# Altium PCB outputs.PcbDoc
Units mil, origin at the board's own origin, x right, y up, seen from the top; angles counter-clockwise.
Board outline 4200 x 640 mil, 2 copper layers (Top Layer, Bottom Layer); 5 components, 24 nets, 39 pads, 0 vias.
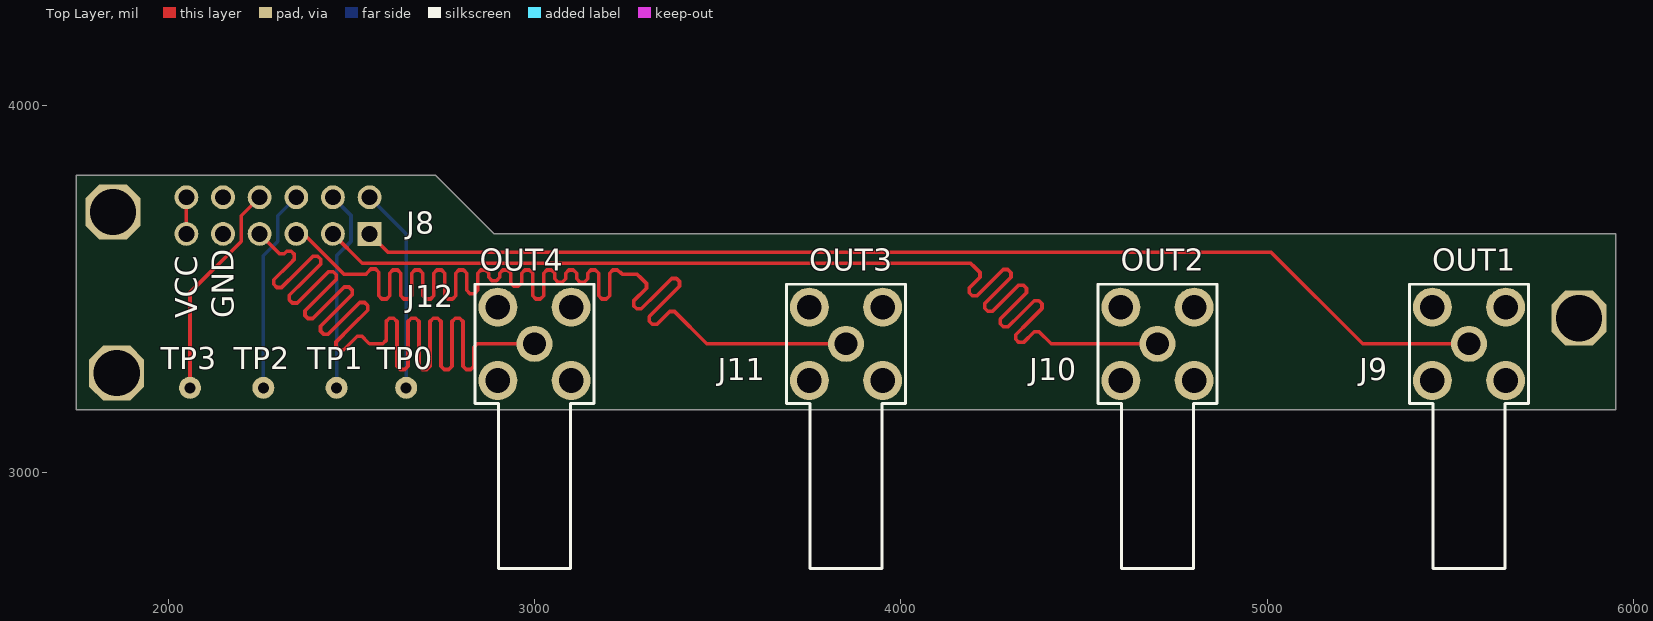
[diagram p0: Top Layer view]
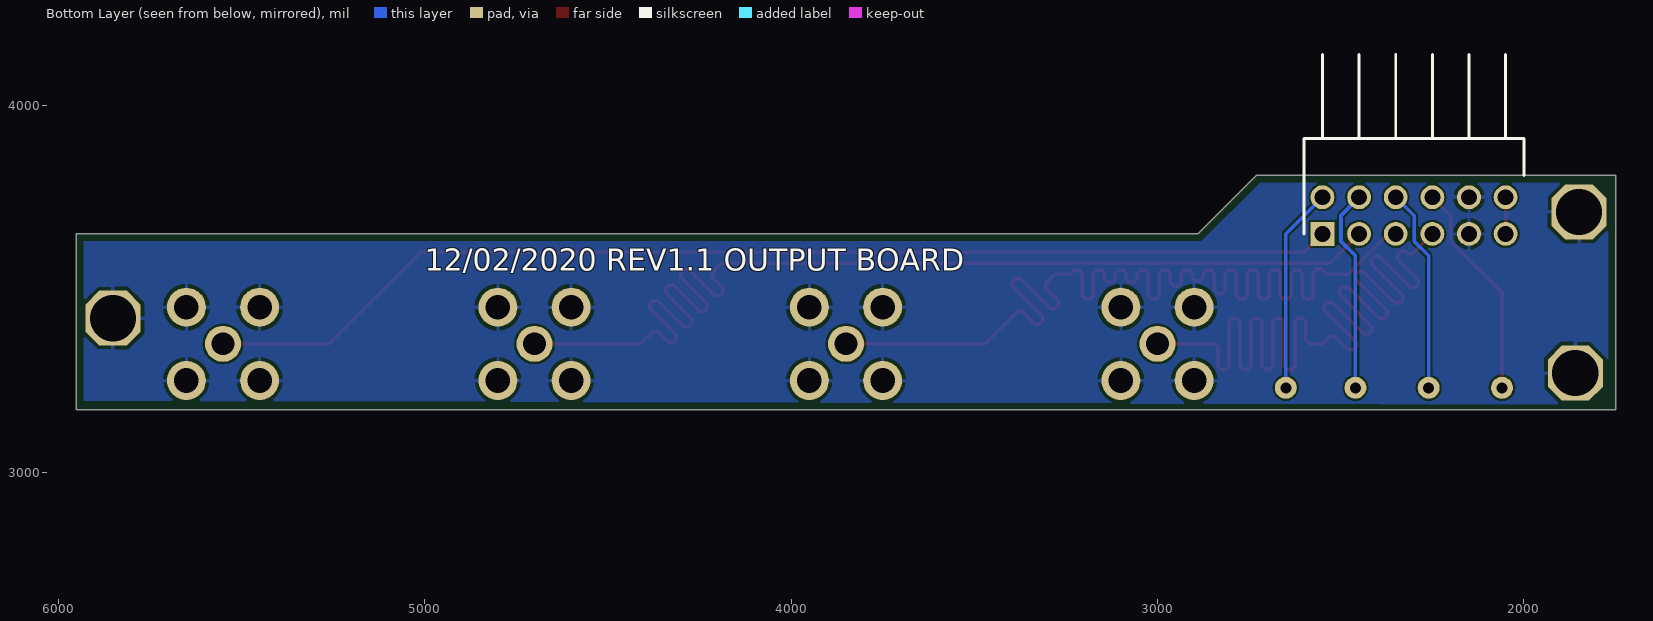
[diagram p1: Bottom Layer view, seen from below]

## Layer stack, top to bottom
Top Solder: solder mask 0.4, Solder Resist, Dk 3.5
Top Layer: signal copper 1.4
Dielectric 1: dielectric 12.6, FR-4, Dk 4.8
Bottom Layer: signal copper 1.4
Bottom Solder: solder mask 0.4, Solder Resist, Dk 3.5

## Board outline
1750,3170 1750,3810 2730,3810 2890,3650 5950,3650 5950,3170

## Design rules (kind name [scope] priority, off if disabled: settings)
BoardOutlineClearance [All] p1: gap=16 ignorepadtopadclearanceinfootprint=FALSE except(0: Arc-SplitContinuation Track-SplitContinuation SMDPad-SplitContinuation THPad-SplitContinuation Via-SplitContinuation Fill-SplitContinuation Poly-SplitContinuation Region-SplitContinuation Text-SplitContinuation)
Clearance [All] p1: gap=6 ignorepadtopadclearanceinfootprint=FALSE except(0: Arc-Hole Track-Hole SMDPad-Hole THPad-Hole Via-Hole Fill-Hole Poly-Hole Region-Hole Text-Hole; 12: Arc-SMDPad Arc-THPad Track-SMDPad Track-THPad SMDPad-SMDPad SMDPad-THPad THPad-THPad)
HoleSize [All] p1: absolutevalues=TRUE maxlimit=245 minlimit=12 maxpercent=80.000 minpercent=20.000
MatchedLengths PMOD->SMA [All] p1: tolerance=50 checknetsindiffpair=FALSE checkdiffpairvsdiffpair=TRUE checkxsignals=TRUE checkothers=TRUE
PolygonConnect [All] p1: connectstyle=Relief reliefconductorwidth=10 reliefentries=4 polygonreliefangle="90 Angle" airgapwidth=10
RoutingVias [All] p1: holewidth=245 width=490 viastyle="Through Hole" minholewidth=6 minwidth=12 maxholewidth=23.62 maxwidth=47.24
SolderMaskExpansion [All] p1: expansion=4
Width [All] p1: maxlimit=78.74 minlimit=6 preferedwidth=10 minimp=50.000000 maximp=50.000000 favimp=50.000000
29 further rules are at their usual default settings.

## Components (designator, comment, footprint, x,y, rotation, side; value= is the part's Value field where it differs from the comment)
J8 "OUTPUTS" HDRRA12W64P254_2X6_1524X254X610P 2550,3650 r180 top
J9 "OP0" 142-0701-501 5550,3512.6 r90 top
J10 "OP1" 142-0701-501 4700,3512.6 r90 top
J11 "OP2" 142-0701-501 3850,3512.6 r90 top
J12 "OP3" 142-0701-501 3000,3512.6 r90 top

## Footprints (in the part's own frame and the unit in brackets; to place one, negate y for a bottom-side part, rotate by r counter-clockwise, add the part's x,y. Pads: shape width x height; smd on the part's side, far side on the other; paste and mask are expansions set on the pad)
142-0701-501 [mm]
  round 2.5 hole 1.57: 1(-4.13,0)
  round 2.7 hole 1.7: 2(-6.67,2.54) 3(-1.59,2.54) 4(-6.67,-2.54) 5(-1.59,-2.54)
  silkscreen extent -19.69,-4.13 0,4.13
HDRRA12W64P254_2X6_1524X254X610P [mm]
  rect 1.65x1.65 hole 1.1: 1(0,0)
  round 1.65 hole 1.1: 2(0,-2.54) 3(2.54,0) 4(2.54,-2.54) 5(5.08,0) 6(5.08,-2.54) 7(7.62,0) 8(7.62,-2.54) 9(10.16,0) 10(10.16,-2.54) 11(12.7,0) 12(12.7,-2.54)
  body extent -1.27,-12.44 13.97,0.32, height 6.1

## Part data
J8: library part TSW-106-08-L-D-RA, "Connector", Manufacturer_Name=SAMTEC, Mouser Part Number=200-TSW10608LDRA, RS Part Number=7670934P, Datasheet Link=http://suddendocs.samtec.com/catalog_english/tsw_th.pdf, Height=6.1mm, Manufacturer_Part_Number=TSW-106-08-L-D-RA, Mouser Price/Stock=https://www.mouser.com/Search/Refine.aspx?Keyword=200-TSW10608LDRA, RS Price/Stock=http://uk.rs-online.com/web/p/products/7670934P
J9 J10 J11 J12: library part 142-0701-501, "Connector", Manufacturer_Name=Cinch, RS Part Number=8859850, Datasheet Link=http://uk.rs-online.com/web/p/products/8859850, Manufacturer_Part_Number=142-0701-501, RS Price/Stock=http://uk.rs-online.com/web/p/products/8859850

## Free pads (board coordinates)
  round 60 hole 30: 5(2650,3230) 6(2460,3230) 7(2260,3230) 8(2060,3230)
  oct 150x150 hole 126: 9(1850,3710) 9(1860,3270) 9(5850,3420)

## Nets (pads, with @x,y where several pads share a name; then routed paths per layer and width w, separated by ;. In a path a pad name is that pad's centre, name@x,y a point inside that pad or via, vN(x,y) a via of type N, cw(c..) or ccw(c..) an arc to the next point about the centre after c; other vN are vias at no path point)
GND: J8.9 J8.10 J9.2 J9.3 J9.4 J9.5 J10.2 J10.3 J10.4 J10.5 J11.2 J11.3 J11.4 J11.5 J12.2 J12.3 J12.4 J12.5 pad.9
IL0: 
IL1: 
IL2: 
IL3: 
IL4: 
IL5: 
NetIC2_13: 
NetIC2_14: 
NetIC2_15: 
NetIC2_16: 
NetIC2_17: 
NetIC2_18: 
OP0: J8.1 J9.1 | length 3124.3
  Top Layer w10: J8.1 2600,3600 5010,3600 5260,3350 J9.1
OP1: J8.3 J10.1 | length 3124.3
  Top Layer w10: J8.3 2530,3570 4190,3570 4200.61,3559.39 4215.46,3544.54 4215.46,3531.82 4186.04,3502.4 4186.04,3489.68 4194.53,3481.19 4207.26,3481.19 4243.03,3516.97 4278.81,3552.74 4291.54,3552.74 4300.02,3544.26 4300.02,3531.53 4264.25,3495.75 4228.47,3459.98 4228.47,3447.25 4236.95,3438.76 4249.68,3438.76 4285.46,3474.54 4321.24,3510.32 4333.96,3510.32 4342.45,3501.83 4342.45,3489.1 4306.67,3453.33 4270.9,3417.55 4270.9,3404.82 4279.38,3396.34 4292.11,3396.34 4327.89,3432.11 4363.66,3467.89 4376.39,3467.89 4384.88,3459.41 4384.88,3446.68 4349.1,3410.9 4313.32,3375.12 4313.32,3362.4 4321.81,3353.91 4334.53,3353.91 4363.95,3383.32 4376.68,3383.32 4410,3350 J10.1
OP2: J8.5 J11.1 | length 3130.5
  Top Layer w10: J8.5 2370,3650 2480,3540 2530,3540 2540,3540 2545,3545 2554,3554 2566,3554 2575,3545 2575,3540 2575,3481.44 2584,3472.44 2596,3472.44 2605,3481.44 2605,3540 2605,3542.57 2614,3551.57 2626,3551.57 2635,3542.57 2635,3540 2635,3481.44 2644,3472.44 2656,3472.44 2665,3481.44 2665,3540 2665,3542.57 2674,3551.57 2686,3551.57 2695,3542.57 2695,3540 2695,3481.44 2704,3472.44 2716,3472.44 2725,3481.44 2725,3540 2725,3542.57 2734,3551.57 2746,3551.57 2755,3542.57 2755,3540 2755,3481.44 2764,3472.44 2776,3472.44 2785,3481.44 2785,3540 2785,3542.57 2794,3551.57 2806,3551.57 2815,3542.57 2815,3540 2815,3495.98 2824,3486.98 2836,3486.98 2845,3495.98 2845,3540 2845,3542.57 2854,3551.57 2866,3551.57 2875,3542.57 2875,3540 2875,3531.47 2884,3522.47 2896,3522.47 2905,3531.47 2905,3540 2905,3542.57 2914,3551.57 2926,3551.57 2935,3542.57 2935,3540 2935,3516.07 2944,3507.07 2956,3507.07 2965,3516.07 2965,3540 2965,3542.57 2974,3551.57 2986,3551.57 2995,3542.57 2995,3540 2995,3481.44 3004,3472.44 3016,3472.44 3025,3481.44 3025,3540 3025,3542.57 3034,3551.57 3046,3551.57 3055,3542.57 3055,3540 3055,3527.35 3064,3518.35 3076,3518.35 3085,3527.35 3085,3540 3085,3542.57 3094,3551.57 3106,3551.57 3115,3542.57 3115,3540 3115,3527.35 3124,3518.35 3136,3518.35 3145,3527.35 3145,3540 3145,3542.57 3154,3551.57 3166,3551.57 3175,3542.57 3175,3540 3175,3481.44 3184,3472.44 3196,3472.44 3205,3481.44 3205,3540 3205,3542.57 3214,3551.57 3226,3551.57 3235,3542.57 ; 3235,3542.68 3235,3544.89 ; 3235,3545 3240,3540 3265,3540 3280,3540 3290.61,3529.39 3305.46,3514.54 3305.46,3501.82 3270.41,3466.77 3270.41,3454.04 3278.89,3445.56 3291.62,3445.56 3333.03,3486.97 3374.44,3528.38 3387.17,3528.38 3395.66,3519.89 3395.66,3507.17 3354.25,3465.75 3312.83,3424.34 3312.83,3411.61 3321.32,3403.13 3334.05,3403.13 3369.1,3438.18 3381.82,3438.18 3470,3350 J11.1
OP3: J8.7 J12.1 | length 3093.7
  Top Layer w10: J8.7 2300,3600 2304.24,3595.76 2316.97,3595.76 2323.65,3602.43 2336.38,3602.43 2344.86,3593.95 2344.86,3581.22 2331.82,3568.18 2288.69,3525.05 2288.69,3512.32 2297.17,3503.83 2309.9,3503.83 2353.03,3546.97 2395.36,3589.29 2408.08,3589.29 2416.57,3580.81 2416.57,3568.08 2374.25,3525.75 2331.11,3482.62 2331.11,3469.89 2339.6,3461.41 2352.33,3461.41 2395.46,3504.54 2437.78,3546.86 2450.51,3546.86 2459,3538.38 2459,3525.65 2416.67,3483.33 2373.54,3440.19 2373.54,3427.47 2382.02,3418.98 2394.75,3418.98 2437.89,3462.11 2481.02,3505.25 2493.75,3505.25 2502.23,3496.76 2502.23,3484.03 2459.1,3440.9 2415.97,3397.77 2415.97,3385.04 2424.45,3376.55 2437.18,3376.55 2480.31,3419.69 2523.45,3462.82 2536.17,3462.82 2544.66,3454.34 2544.66,3441.61 2501.53,3398.47 2458.39,3355.34 2458.39,3342.61 2466.88,3334.13 2479.61,3334.13 2516.37,3370.9 2529.1,3370.9 2543.95,3356.05 2550,3350 2565,3350 2586,3350 2595,3359 2595,3411 2604,3420 2616,3420 2625,3411 2625,3350 2625,3289 2634,3280 2646,3280 2655,3289 2655,3350 2655,3411 2664,3420 2676,3420 2685,3411 2685,3350 2685,3289 2694,3280 2706,3280 2715,3289 2715,3350 2715,3411 2724,3420 2736,3420 2745,3411 2745,3350 2745,3289 2754,3280 2766,3280 2775,3289 2775,3350 2775,3411 2784,3420 2796,3420 2805,3411 2805,3350 2805,3289 2814,3280 2826,3280 2835,3289 2835,3341 2844,3350 2990,3350 J12.1
OTP0: J8.2 pad.5 | length 561.4
  Bottom Layer w10: J8.2 2650,3650 pad.5
OTP1: J8.4 pad.6 | length 556.8
  Bottom Layer w10: J8.4 2499.48,3700.52 2499.48,3629.5 2460,3590.02 pad.6
OTP2: J8.6 pad.7 | length 557.3
  Bottom Layer w10: pad.7 2260,3590.02 2299.48,3629.5 2299.48,3699.48 J8.6
OTP3: J8.8 pad.8 | length 598.7
  Top Layer w10: pad.8 2060,3490.02 2199.48,3629.5 2199.48,3699.48 J8.8
TP0: 
TP1: 
VCC: J8.11 J8.12 | length 100
  Top Layer w10: J8.11 J8.12

## Polygon pours and split planes (outlines as drawn)
GND on Bottom Layer "GND_PLN" (solid, pour order 0): 1770,3790 1770,3183.65 5930,3194.7 5930,3630 2880,3630 2720,3790

## Silkscreen, mask and mechanical layers (free items; w line width, h text height)
Top Overlay:
  text "OUT4" at 2850,3550 h60
  text "OUT3" at 3750,3550 h60
  text "OUT2" at 4600,3550 h60
  text "OUT1" at 5450,3550 h60
  text "VCC" at 2080,3420 h60 r90
  text "GND" at 2180,3420 h60 r90
  text "TP3" at 1980,3280 h60
  text "TP2" at 2180,3280 h60
  text "TP1" at 2380,3280 h60
  text "TP0" at 2570,3280 h60
Bottom Overlay:
  text "12/02/2020 REV1.1 OUTPUT BOARD" at 5000,3550 h60
EdgeCuts:
  lines w10: 1750,3170 2800,3170 5950,3170 5950,3650 4942.5,3650 3667.5,3650 2890,3650 2730,3810 2710,3810 1750,3810 1750,3170

## Dimensions
3098.43,2737.4 to 3098.43,3187.4 on Dimensions
5950,3650 to 1750,3810 on Dimensions
5950,3170 to 5950,3650 on Dimensions
1750,3170 to 1750,3810 on Dimensions